# EAGLE board NSE2022_ROCKETCONTROLLER_ver0 (EAGLE 9.6.0)
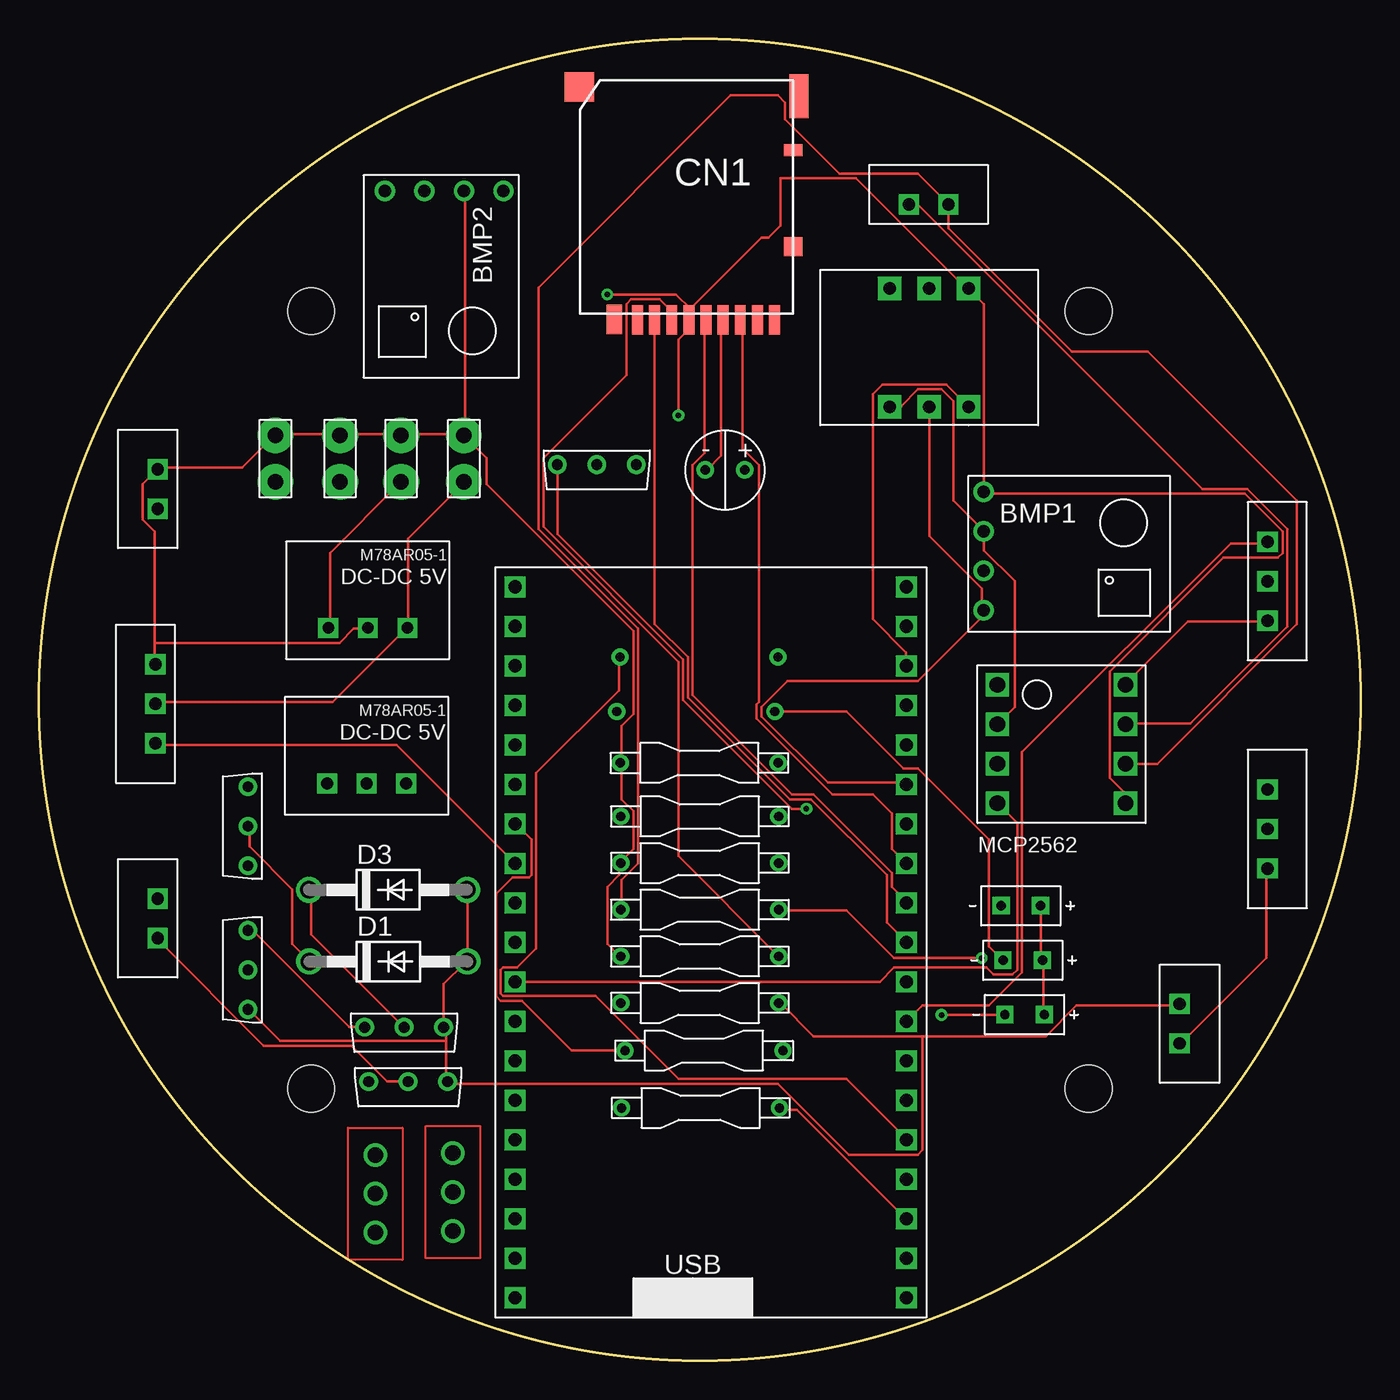
[diagram p0: board, top side]
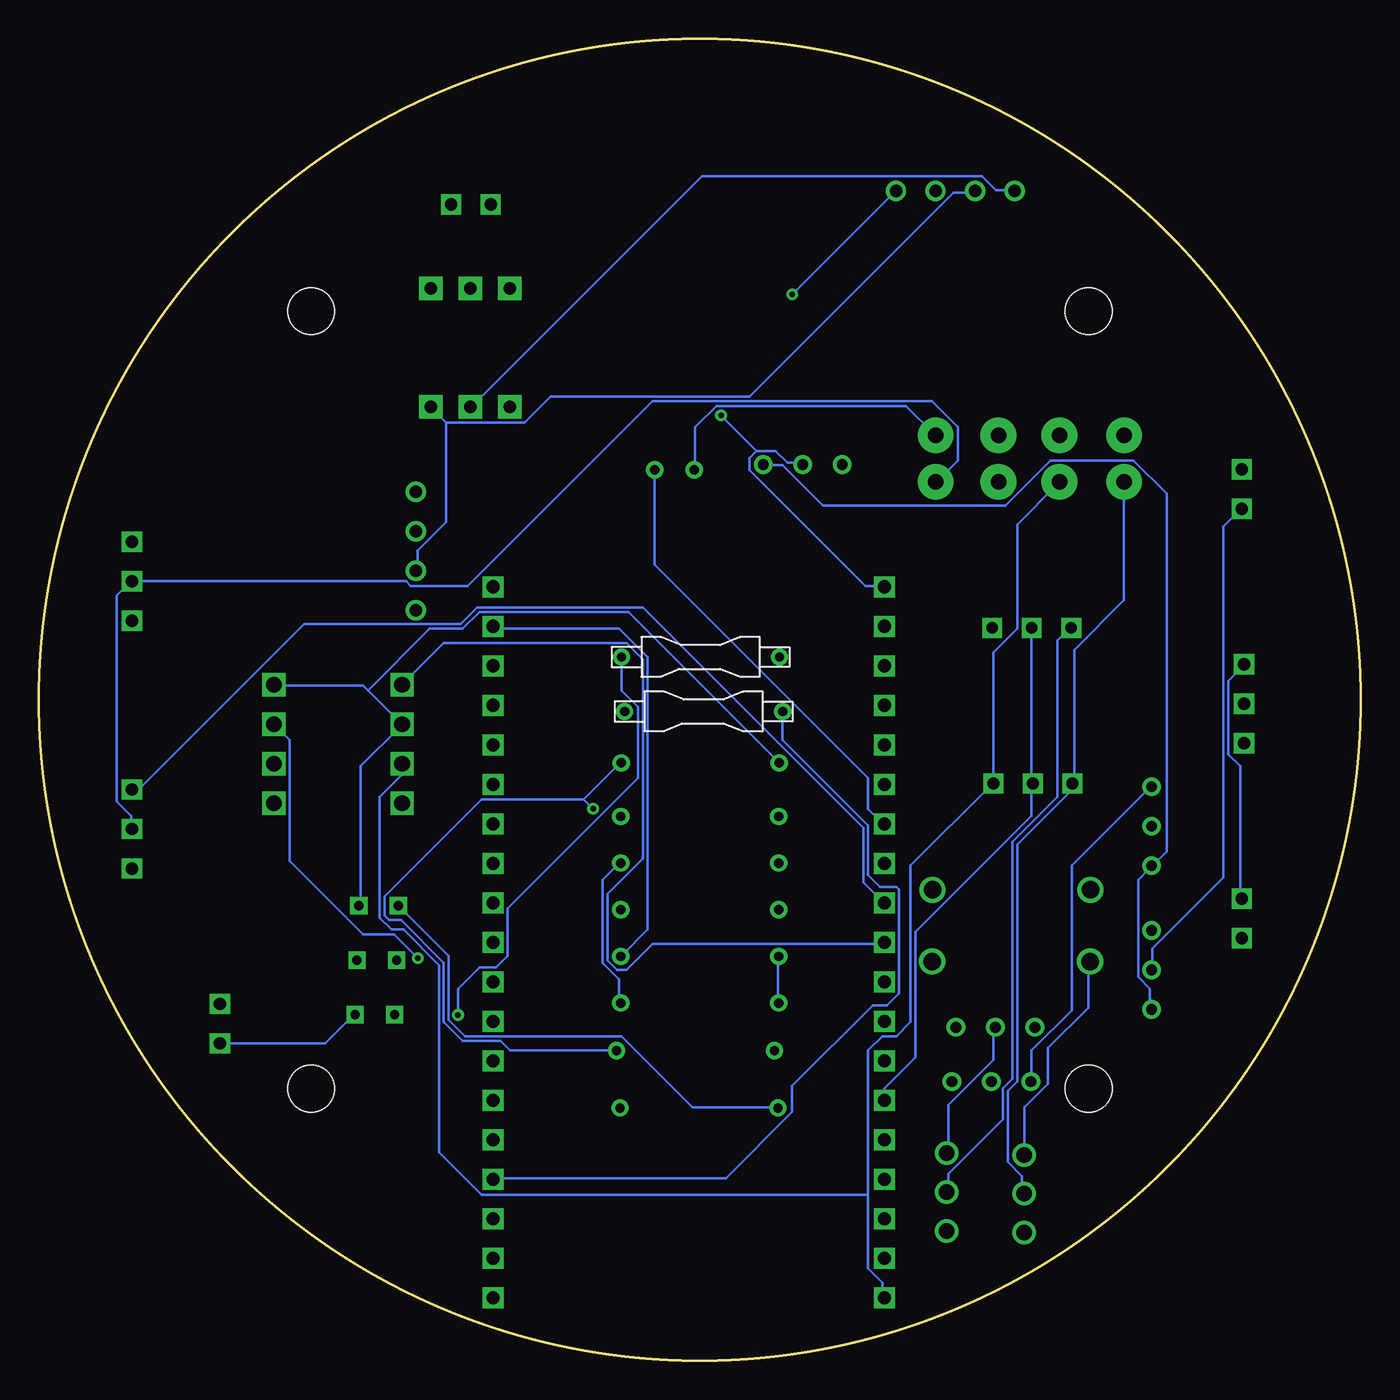
[diagram p1: board, bottom side, seen from below]

Size 85 x 85 mm. Coordinates in mm from the lower left corner, seen from the top.
Outline: circle at 42.5,42.5 radius 42.5
Copper layers (1*16): Top 0.035mm / dielectric 1.5mm / Bottom 0.035mm
Design rules "default": minimum track width 6mil, minimum drill 0.35mm, track to track 6mil, track to pad 6mil, pad to pad 6mil, via to via 6mil, smd to smd 6mil, copper to edge 40mil, drill to drill 6mil, minimum pad ring 10mil, minimum via ring 8mil, stop-mask expansion 4mil, vias tented up to drill 0mil, thermal gap 10mil
Holes 3 mm at 67.5,67.5 67.5,17.5 17.5,17.5 17.5,67.5

## Footprints (pad centres in the part's own frame; a part is rotated, then mirrored left to right if it is on the bottom)
GY-68 = drill 0.8: P1 -5,4; P2 -5,1.46; P3 -5,-1.08; P4 -5,-3.62
BMX055 = drill 0.8 pad 1.5 square: 3V3 8.81,-9.53; GND 1.19,-4.46; SCL 1.19,-9.53; SDA 1.19,-7; VCC 8.81,-4.46; VCCIO 8.81,-7
CAPACITOR-ELECTROLYTIC_1 = drill 0.6: AN -1.27,0; KS 1.27,0
CERAMIC_CAPACITOR = drill 1 pad 2.3: P$1 0,0; P$2 0,3
DM3AT = smd 0.7 x 1.9: CD/DAT3 2.2,6.4; CLK -1.1,6.4; CMD 1.1,6.4; DAT0 -3.3,6.4; DAT1 -4.4,6.4; DAT2 3.3,6.4; DET_B -5.5,6.4; VDD 0,6.4; VSS -2.2,6.4 | smd 1.2 x 0.8: DET_A -6.7,-4.5 | smd 1 x 1.9: P$9 4.8,6.381 | smd 1.2 x 1.2: P$11 -6.7,1.7 | smd 1.2 x 2.8: P$13 -7.081,-7.973 | smd 1.9 x 1.9: P$14 7.054,-8.562
DO41-10 = drill 1.118: A 5.08,0; C -5.08,0
REGISTER = drill 0.6: A -5.08,0; B 5.08,0
SRIDE_SWITCH = drill 1: L -2.5,0; LR 0,0; R 2.5,0
ESP32 = drill 0.85 square: 3.3V 1.27,46.99; 5V 1.27,1.27; EN 1.27,44.45; GND1 1.27,13.97; GND2 26.44,46.99; GND3 26.44,31.75; GPIO0 26.44,13.97; GPIO2 26.44,11.43; GPIO4 26.44,16.51; GPIO5 26.44,24.13; GPIO6 26.44,1.27; GPIO7 26.44,3.81; GPIO8 26.44,6.35; GPIO9 1.27,8.89; GPIO10 1.27,6.35; GPIO11 1.27,3.81; GPIO12 1.27,16.51; GPIO13 1.27,11.43; GPIO14 1.27,19.05; GPIO15 26.44,8.89; GPIO16 26.44,19.05; GPIO17 26.44,21.59; GPIO18 26.44,26.67; GPIO19 26.44,29.21; GPIO21 26.44,34.29; GPIO22 26.44,41.91; GPIO23 26.44,44.45; GPIO25 1.27,26.67; GPIO26 1.27,24.13; GPIO27 1.27,21.59; GPIO32 1.27,31.75; GPIO33 1.27,29.21; GPIO34 1.27,36.83; GPIO35 1.27,34.29; GPIO36 1.27,41.91; GPIO39 1.27,39.37; RX 26.44,36.83; TX 26.44,39.37
2SK4017 = drill 0.7: DRAIN 0,0; GATE 2.54,0; SOURCE -2.54,0
2SJ681 = drill 0.7: DRAIN 0,0; GATE 2.54,0; SOURCE -2.54,0
M78AR05-1 = drill 0.75 pad 1.27 square: GND 0,0; VIN 2.54,0; VOUT -2.54,0
2PIN = drill 0.8 square: PIN1 1.27,0; PIN2 3.81,0
MCP2562 = drill 1 square: CANH 8.255,6.35; CANL 8.255,3.81; RXD 0,1.27; STBY 8.255,8.89; TXD 0,8.89; VDD 0,3.81; VIO 8.255,1.27; VSS 0,6.35
3PIN = drill 0.8 square: PIN1 1.27,0; PIN2 3.81,0; PIN3 6.35,0
LED = drill 0.6 square: MINUS 1.27,0; PLUS 3.81,0

## Placement (x,y rotation side)
BMP1  BMP180  [GY-68]  65.75,51.88 0 top
BMP2  BMP180  [GY-68]  25.88,70.22 270 top
BMX1  BMX055  [BMX055]  50.26,60.15 90 top
C1  [CAPACITOR-ELECTROLYTIC_1]  44.13,57.28 0 top
CERAMIC_CAPACITOR3  CERAMIC_CAPACITOR  [CERAMIC_CAPACITOR]  27.33,56.51 0 top
CERAMIC_CAPACITOR4  CERAMIC_CAPACITOR  [CERAMIC_CAPACITOR]  23.29,56.51 0 top
CERAMIC_CAPACITOR5  CERAMIC_CAPACITOR  [CERAMIC_CAPACITOR]  19.37,56.51 0 top
CERAMIC_CAPACITOR6  CERAMIC_CAPACITOR  [CERAMIC_CAPACITOR]  15.21,56.51 0 top
CN1  DM3AT  [DM3AT]  41.8,73.34 180 top
D1  1N4004  [DO41-10]  22.48,25.66 0 top
D3  1N4004  [DO41-10]  22.45,30.28 0 top
R1  [REGISTER]  42.5,35 0 top
R2  [REGISTER]  42.5,32 0 top
R3  [REGISTER]  42.5,29 0 top
R4  [REGISTER]  42.5,26 0 top
R5  [REGISTER]  42.5,23 0 top
R9  [REGISTER]  42.47,38.44 0 top
R10  [REGISTER]  42.77,19.94 0 top
R12  [REGISTER]  42.45,45.25 0 bottom
R14  [REGISTER]  42.25,41.75 0 bottom
R15  [REGISTER]  42.55,16.25 0 top
SRIDE_SWTCH1  SRIDE_SWITCH  [SRIDE_SWITCH]  26.63,10.84 270 top
SRIDE_SWTCH2  SRIDE_SWITCH  [SRIDE_SWITCH]  21.63,10.73 270 top
U$4  ESP32  [ESP32]  29.36,2.77 0 top
U$8  2SK4017-NCH  [2SK4017]  35.88,57.63 0 top
U$12  2SJ681-PCH  [2SJ681]  23.49,21.44 0 top
U$13  2SJ681-PCH  [2SJ681]  13.44,25.13 270 top
U$14  M78AR05-1  [M78AR05-1]  21.15,47.12 180 top
U$18  2PIN  [2PIN]  54.68,74.36 0 top
U$19  2PIN  [2PIN]  73.36,24.21 270 top
U$20  2PIN  [2PIN]  7.64,25.9 90 top
U$21  2PIN  [2PIN]  7.64,53.51 90 top
U$27  [MCP2562]  61.64,34.57 0 top
U$30  2SJ681-PCH  [2SJ681]  23.75,17.94 0 top
U$31  2SJ681-PCH  [2SJ681]  13.44,34.37 270 top
U$32  M78AR05-1  [M78AR05-1]  21.08,37.12 180 top
U$42  3PIN  [3PIN]  7.49,38.43 90 top
U$43  3PIN  [3PIN]  79.01,38 270 top
U$44  3PIN  [3PIN]  79.01,53.93 270 top
U$63  LED  [LED]  60.85,22.25 0 top
U$64  LED  [LED]  60.73,25.75 0 top
U$69  LED  [LED]  60.61,29.25 0 top

## Library data of the parts
BMP1 BMP2 = BMP180
BMX1 = BMX055
C1 = normal capacitor; F: 10uF
CERAMIC_CAPACITOR3-CERAMIC_CAPACITOR6 = capacitor
CN1 = microSD
D1 D3 = diode
R1-R5 R9 R12 R14 R15 = normal register; R: 10k
R10 = normal register; R: 1k
SRIDE_SWTCH1 SRIDE_SWTCH2 = Switches
U$4 = ESP32
U$8 U$12 U$13 U$30 U$31 = MOSFET
U$14 U$32 = M78AR05-1
U$18-U$21 = 2PIN
U$27 = MCP2562
U$42-U$44 = 3PIN
U$63 U$64 U$69 = LEDkato

## Nets
+3V3: BMP1.P1 BMP2.P1 BMX1.3V3 CN1.VDD U$4.3.3V U$8.DRAIN U$27.VIO
+5V: CERAMIC_CAPACITOR5.P$1 U$4.5V U$27.VDD U$32.VOUT
BATTE_RC: U$20.PIN1 U$30.DRAIN
BATTE_SERVO: U$13.DRAIN U$21.PIN1
CANH1: U$4.GPIO27 U$27.RXD
CANH1OUT: R3.B U$18.PIN1 U$27.CANH
CANL1: U$4.GPIO26 U$27.TXD
CANL1OUT: R3.A U$18.PIN2 U$27.CANL
FLIGHTPIN: C1.KS R10.A U$4.GPIO32
FP: D1.A D3.A R2.B R5.B U$8.GATE U$12.GATE U$13.GATE U$19.PIN1 U$30.GATE U$31.GATE
GND: BMP1.P2 BMP2.P2 BMX1.GND C1.AN CERAMIC_CAPACITOR3.P$2 CERAMIC_CAPACITOR4.P$2 CERAMIC_CAPACITOR5.P$2 CERAMIC_CAPACITOR6.P$2 CN1.VSS R2.A R4.A R5.A R9.A U$4.GND1 U$14.GND U$19.PIN2 U$20.PIN2 U$21.PIN2 U$27.STBY U$27.VSS U$32.GND U$42.PIN3 U$43.PIN3 U$44.PIN3 U$63.PLUS U$64.PLUS U$69.PLUS
IMBUSY: U$4.GPIO14
LED1: R12.B U$4.GPIO2
LED2: R14.B U$4.GPIO15
LED3: R15.B U$4.GPIO8
MISO: CN1.DAT0 U$4.GPIO19
MOSI: CN1.CMD R4.B U$4.GPIO23
N$1: U$4.GND2
N$2: U$12.SOURCE U$13.SOURCE
N$5: R9.B R10.B U$8.SOURCE
N$6: CERAMIC_CAPACITOR4.P$1 SRIDE_SWTCH1.LR U$14.VIN
N$10: D1.C SRIDE_SWTCH2.L U$31.DRAIN
N$11: D3.C SRIDE_SWTCH1.L U$12.DRAIN
N$15: R12.A U$63.MINUS
N$16: R14.A U$64.MINUS
N$17: R15.A U$69.MINUS
N$22: U$30.SOURCE U$31.SOURCE
N$24: CERAMIC_CAPACITOR6.P$1 SRIDE_SWTCH2.LR U$32.VIN
OFFPIN: U$4.GPIO12
SCK: CN1.CLK U$4.GPIO18
SCL: BMP1.P3 BMP2.P3 BMX1.SCL U$4.GPIO22
SDA: BMP1.P4 BMP2.P4 BMX1.SDA U$4.GPIO21
SERVO1: U$4.GPIO33 U$42.PIN1
SERVO2: U$4.GPIO25 U$43.PIN1
SERVO3: U$4.GPIO16 U$44.PIN1
SERVO4: U$4.GPIO4
SERVO5V: CERAMIC_CAPACITOR3.P$1 U$14.VOUT U$42.PIN2 U$43.PIN2 U$44.PIN2
SS: CN1.CD/DAT3 U$4.GPIO5
VCC: BMX1.VCC
VCCIO: BMX1.VCCIO

## Tracks (layer width: path | path; a pad name or v marks a point on that pad's centre or on a via)
+3V3  (via drill 0.35)
  Top 0.152: 41.89,67.65 41.89,67.04 CN1.VDD | 41.89,67.65 46.46,72.22 46.92,72.22 47.68,72.98 47.68,76.03 52.56,76.03 59.72,68.86 BMX1.3V3 59.87,68.86 60.79,67.95 60.79,55.91 BMP1.P1 60.79,55.76 77.55,55.76 79.99,53.32 79.99,51.95 79.69,51.64 76.18,51.64 68.86,44.33 68.86,37.47 69.78,36.56 69.78,35.95 U$27.VIO | v36.56,68.56 40.98,68.56 41.89,67.65 | 41.89,67.65 CN1.VDD | v41.13,60.79 41.13,65.66 41.74,66.27 41.74,66.88 CN1.VDD
  Bottom 0.152: 38.84,58.5 37.62,58.5 36.86,57.74 35.95,57.74 U$8.DRAIN | 38.84,58.5 39.3,58.05 39.3,57.28 31.83,49.81 30.77,49.81 U$4.3.3V | v36.56,68.56 30,75.11 BMP2.P1 | v41.13,60.79 38.84,58.5
+5V
  Bottom 0.152: CERAMIC_CAPACITOR5.P$1 19.49,56.37 22.08,53.78 22.08,47.07 23.6,45.55 23.6,37.17 U$32.VOUT 23.75,37.01 28.94,31.83 28.94,21.77 29.85,20.86 30.77,20.86 31.68,19.95 31.68,10.65 | 31.68,10.65 31.68,5.92 30.77,5.01 30.77,4.09 U$4.5V | 31.68,10.65 56.52,10.65 59.26,13.39 59.26,25.43 61.55,27.72 62.31,27.72 63.07,28.48 63.07,36.25 61.7,37.62 61.7,38.23 U$27.VDD
BATTE_RC
  Top 0.152: U$30.DRAIN 23.6,17.96 22.38,17.96 20.1,20.25 14.46,20.25 7.6,27.11 U$20.PIN1
BATTE_SERVO
  Bottom 0.152: U$13.DRAIN 13.39,25.28 13.39,26.5 8.82,31.07 8.82,53.62 7.75,54.69 U$21.PIN1
CANH1
  Top 0.152: U$4.GPIO27 30.77,24.36 54.08,24.36 55,25.28 60.94,25.28 61.4,24.82 62.62,24.82 62.92,25.13 62.92,34.58 61.7,35.79 U$27.RXD
CANH1OUT  (via drill 0.35)
  Top 0.152: v60.64,25.89 55,25.89 51.95,28.94 47.68,28.94 R3.B | U$18.PIN1 56.06,74.35 56.52,74.35 74.81,56.06 77.7,56.06 80.3,53.47 80.3,47.22 74.05,40.98 69.93,40.98 U$27.CANH
  Bottom 0.152: v60.64,25.89 62.16,27.41 64.14,27.41 68.86,32.14 68.86,39.91 69.78,40.82 U$27.CANH
CANL1
  Bottom 0.152: U$4.GPIO26 30.77,26.8 45.55,26.8 47.22,25.13 47.83,25.13 48.44,25.74 48.44,30 46.16,32.29 46.16,45.09 47.22,46.16 58.96,46.16 61.55,43.57 U$27.TXD
CANL1OUT
  Top 0.152: R3.A 37.47,29.09 37.47,30.92 38.54,31.98 38.54,47.07 32.14,53.47 32.14,69.02 44.48,81.36 47.53,81.36 47.99,80.91 47.99,79.84 51.49,76.33 56.52,76.33 58.35,74.5 U$18.PIN2 58.5,74.35 58.5,72.83 66.43,64.9 71.3,64.9 80.91,55.3 80.91,47.38 71.91,38.38 69.93,38.38 U$27.CANL
FLIGHTPIN
  Top 0.152: R10.A 37.62,19.95 34.27,19.95 31.07,23.14 29.7,23.14 29.39,23.45 29.39,30 30.46,31.07 31.53,31.07 31.68,31.22 31.68,33.51 30.77,34.42 U$4.GPIO32
  Bottom 0.152: C1.KS 45.4,57.13 45.4,51.19 31.68,37.47 31.68,35.49 30.77,34.58 U$4.GPIO32
FP
  Top 0.152: 56.83,20.86 49.81,20.86 47.68,22.99 R5.B | 56.83,20.86 64.75,20.86 66.73,22.84 73.28,22.84 U$19.PIN1 | 26.19,20.55 26.19,21.16 26.04,21.32 U$12.GATE 26.04,21.47 26.04,24.21 27.41,25.58 D1.A 27.56,25.74 27.56,30.16 D3.A | 26.19,20.55 26.19,17.96 U$30.GATE 26.35,17.81 47.53,17.81 52.1,13.24 56.52,13.24 56.83,13.54 56.83,20.86 | 26.19,20.55 15.52,20.55 13.54,22.54 U$13.GATE
  Bottom 0.152: R5.B 47.68,23.14 47.68,24.52 48.75,25.58 48.75,30.92 47.68,31.98 R2.B | U$13.GATE 13.54,22.69 13.54,23.91 14.31,24.67 14.31,30.92 13.54,31.68 U$31.GATE 13.39,31.83 12.48,32.75 12.48,55.76 14.61,57.89 19.95,57.89 22.84,55 34.58,55 37.17,57.59 38.38,57.59 U$8.GATE
GND
  Top 0.152: U$63.PLUS 64.6,22.38 64.6,25.74 U$64.PLUS 64.45,25.89 64.45,29.24 U$69.PLUS | U$43.PIN3 78.92,31.53 78.92,25.89 73.44,20.4 U$19.PIN2 | U$44.PIN3 78.92,47.53 73.89,47.53 69.93,43.57 U$27.STBY | U$27.VSS 61.7,40.98 62.77,42.04 62.77,50.12 60.79,52.1 60.79,53.32 BMP1.P2 60.64,53.47 58.81,55.3 58.81,61.7 58.05,62.46 56.52,62.46 55.45,61.4 54.84,61.4 BMX1.GND | 7.45,46.16 7.45,53.32 6.69,54.08 6.69,56.37 7.6,57.28 U$21.PIN2 7.75,57.44 13.09,57.44 15.07,59.42 CERAMIC_CAPACITOR6.P$2 15.22,59.57 19.34,59.57 CERAMIC_CAPACITOR5.P$2 19.49,59.57 23.14,59.57 CERAMIC_CAPACITOR4.P$2 23.3,59.57 27.26,59.57 CERAMIC_CAPACITOR3.P$2 | 7.45,46.16 7.45,44.79 U$42.PIN3 | R4.A 37.32,26.04 36.56,26.8 36.56,30.46 37.32,31.22 37.32,31.98 R2.A 37.47,32.14 38.23,32.9 38.23,35.34 37.47,36.1 37.47,38.38 R9.A 37.47,38.54 37.47,40.82 38.23,41.59 38.23,46.92 28.78,56.37 28.78,58.05 27.41,59.42 CERAMIC_CAPACITOR3.P$2 | CN1.VSS 43.87,66.88 43.87,58.2 42.96,57.28 C1.AN | BMP2.P2 27.41,75.11 27.41,59.57 CERAMIC_CAPACITOR3.P$2 | 7.45,46.16 19.34,46.16 20.25,47.07 21.01,47.07 U$14.GND
  Bottom 0.152: U$19.PIN2 73.28,20.4 66.58,20.4 64.75,22.23 U$63.PLUS | 63.84,43.11 61.7,40.98 U$27.VSS 61.7,40.82 64.29,38.23 64.29,29.39 U$69.PLUS | 63.84,43.11 64.14,43.41 69.78,43.41 U$27.STBY | U$14.GND 21.16,47.07 21.16,37.17 U$32.GND 21.16,37.01 21.16,35.03 28.63,27.56 28.63,19.49 30.61,17.51 30.61,16.74 U$4.GND1 | U$20.PIN2 7.75,29.85 7.75,38.23 8.52,38.99 8.52,43.72 7.6,44.63 U$42.PIN3 | R5.A 37.47,23.14 37.47,25.89 R4.A | C1.AN 42.8,57.28 42.8,60.03 41.43,61.4 29.24,61.4 27.41,59.57 CERAMIC_CAPACITOR3.P$2 | 63.84,43.11 59.87,47.07 57.74,47.07 56.67,48.14 47.07,48.14 37.47,38.54 R9.A
LED1
  Top 0.152: R12.B 37.32,45.24 37.32,43.11 31.98,37.78 31.98,26.5 30.77,25.28 29.85,25.28 29.7,25.13 29.7,23.6 29.85,23.45 35.79,23.45 41.13,18.12 51.95,18.12 55.76,14.31 U$4.GPIO2
LED2
  Bottom 0.152: R14.B 37.17,41.74 37.17,39.91 31.68,34.42 31.68,31.22 30.92,30.46 29.85,30.46 29.7,30.31 29.7,23.6 30.46,22.84 31.38,22.84 36.56,17.66 36.56,15.98 40.82,11.71 55.76,11.71 U$4.GPIO15
LED3
  Top 0.152: R15.B 47.68,16.14 48.75,16.14 55.76,9.12 U$4.GPIO8
MISO
  Top 0.152: CN1.DAT0 45.24,66.88 45.24,58.65 46.31,57.59 46.31,42.35 46.16,42.2 46.16,41.28 51.03,36.4 53.62,36.4 54.84,35.19 54.84,32.9 55.76,31.98 U$4.GPIO19
MOSI
  Top 0.152: CN1.CMD 40.67,67.04 40.67,67.49 39.91,68.26 38.08,68.26 37.78,67.95 37.78,63.38 32.44,58.05 32.44,53.62 41.13,44.94 41.13,32.44 47.53,26.04 R4.B
  Bottom 0.152: U$4.GPIO23 55.76,47.07 47.68,47.07 45.85,45.24 45.85,27.72 47.53,26.04 R4.B
N$2
  Top 0.152: U$13.SOURCE 13.54,27.56 13.85,27.56 19.95,21.47 20.86,21.47 U$12.SOURCE
N$5  (via drill 0.35)
  Top 0.152: v49.36,35.49 48.44,35.49 41.43,42.5 41.43,45.09 33.36,53.17 33.36,57.59 U$8.SOURCE
  Bottom 0.152: 49.97,36.1 56.52,36.1 62.77,29.85 62.77,28.63 62.46,28.33 61.7,28.33 58.96,25.58 58.96,21.77 57.74,20.55 55.3,20.55 54.69,19.95 47.99,19.95 R10.B | 49.97,36.1 47.68,38.38 R9.B | 49.97,36.1 v49.36,35.49
N$6
  Top 0.152: U$14.VIN 18.73,47.22 18.73,51.95 23.14,56.37 CERAMIC_CAPACITOR4.P$1
  Bottom 0.152: SRIDE_SWTCH1.LR 26.5,10.95 26.5,12.02 22.99,15.52 22.99,17.51 22.38,18.12 22.38,33.36 19.49,36.25 19.49,46.31 18.73,47.07 U$14.VIN
N$10
  Top 0.152: U$31.DRAIN 13.54,34.27 13.54,33.05 16.29,30.31 16.29,26.8 17.35,25.74 D1.C
  Bottom 0.152: SRIDE_SWTCH2.L 21.62,16.29 20.1,17.81 20.1,20.1 17.51,22.69 17.51,25.58 D1.C
N$11
  Top 0.152: D3.C 17.51,30.16 17.51,27.41 23.45,21.47 U$12.DRAIN
  Bottom 0.152: U$12.DRAIN 23.6,21.32 23.6,19.34 26.5,16.44 26.5,13.39 SRIDE_SWTCH1.L
N$15  (via drill 0.35)
  Top 0.152: v58.05,22.23 62.01,22.23 U$63.MINUS
  Bottom 0.152: v58.05,22.23 58.05,23.91 56.67,25.28 55.61,25.28 54.84,26.04 54.84,29.09 46.46,37.47 46.46,42.04 47.53,43.11 R12.A
N$16
  Top 0.152: R14.A 47.38,41.74 51.95,41.74 55.61,38.08 56.52,38.08 61.09,33.51 61.09,26.65 61.86,25.89 U$64.MINUS
N$17
  Bottom 0.152: R15.A 37.47,16.29 42.96,16.29 47.53,20.86 57.59,20.86 58.65,21.93 58.65,26.04 61.86,29.24 U$69.MINUS
N$22
  Bottom 0.152: U$30.SOURCE 21.16,17.96 21.16,19.95 18.57,22.54 18.57,31.83 13.54,36.86 U$31.SOURCE
N$24
  Bottom 0.152: CERAMIC_CAPACITOR6.P$1 15.22,56.37 15.22,48.9 18.42,45.7 18.42,37.17 U$32.VIN 18.57,37.01 18.57,36.71 22.08,33.2 22.08,17.96 22.69,17.35 22.69,12.78 21.77,11.87 21.77,10.8 SRIDE_SWTCH2.LR
SCK
  Top 0.152: CN1.CLK 42.8,66.88 42.8,58.35 42.04,57.59 42.04,42.8 48.44,36.4 49.81,36.4 54.84,31.38 54.84,30.46 55.76,29.55 U$4.GPIO18
SCL
  Top 0.152: U$4.GPIO22 55.76,44.79 55.76,45.55 53.62,47.68 53.62,62.16 54.23,62.77 58.35,62.77 59.72,61.4 BMX1.SCL
  Bottom 0.152: 58.81,60.33 53.78,60.33 52.1,62.01 39.3,62.01 26.19,75.11 24.82,75.11 BMP2.P3 | 58.81,60.33 59.72,61.25 BMX1.SCL | 58.81,60.33 58.81,53.93 60.64,52.1 60.64,50.88 BMP1.P3
SDA
  Top 0.152: BMX1.SDA 57.28,61.25 57.28,53.02 60.64,49.66 60.64,48.29 BMP1.P4 60.64,48.14 60.64,47.83 56.52,43.72 48.14,43.72 46.46,42.04 46.46,41.43 50.73,37.17 55.76,37.17 U$4.GPIO21
  Bottom 0.152: BMP2.P4 22.38,75.27 23.45,75.27 24.36,76.18 42.35,76.18 57.13,61.4 BMX1.SDA
SERVO1
  Top 0.152: U$42.PIN1 7.6,39.6 22.99,39.6 30.61,31.98 U$4.GPIO33
SERVO2
  Bottom 0.152: U$43.PIN1 78.92,36.86 78.47,36.86 67.95,47.38 57.89,47.38 56.83,48.44 46.16,48.44 31.98,34.27 31.98,30.77 30.77,29.55 U$4.GPIO25
SERVO3
  Top 0.152: U$44.PIN1 78.92,52.56 76.64,52.56 63.23,39.15 63.23,24.97 61.09,22.84 56.83,22.84 55.91,21.93 U$4.GPIO16
SERVO5V
  Top 0.152: CERAMIC_CAPACITOR3.P$1 27.26,56.37 23.75,52.86 23.75,47.22 U$14.VOUT 23.6,47.07 18.88,42.35 7.6,42.35 U$42.PIN2
  Bottom 0.152: U$43.PIN2 79.08,34.27 79.08,35.03 79.99,35.95 79.99,49.21 79.08,50.12 U$44.PIN2 61.4,50.12 61.09,49.81 57.44,49.81 45.55,61.7 27.56,61.7 25.89,60.03 25.89,57.89 27.26,56.52 CERAMIC_CAPACITOR3.P$1
SS
  Top 0.152: CN1.CD/DAT3 39.6,66.88 39.6,47.38 41.74,45.24 41.74,42.65 48.29,36.1 49.66,36.1 54.54,31.22 54.54,28.17 55.76,26.95 U$4.GPIO5